# Altium PCB MCU.PcbDoc
Units mil, origin at the board's own origin, x right, y up, seen from the top; angles counter-clockwise.
Board outline 4329.4 x 3387.39 mil, 2 copper layers (Top Layer, Bottom Layer); 111 components, 0 nets, 340 pads, 98 vias.
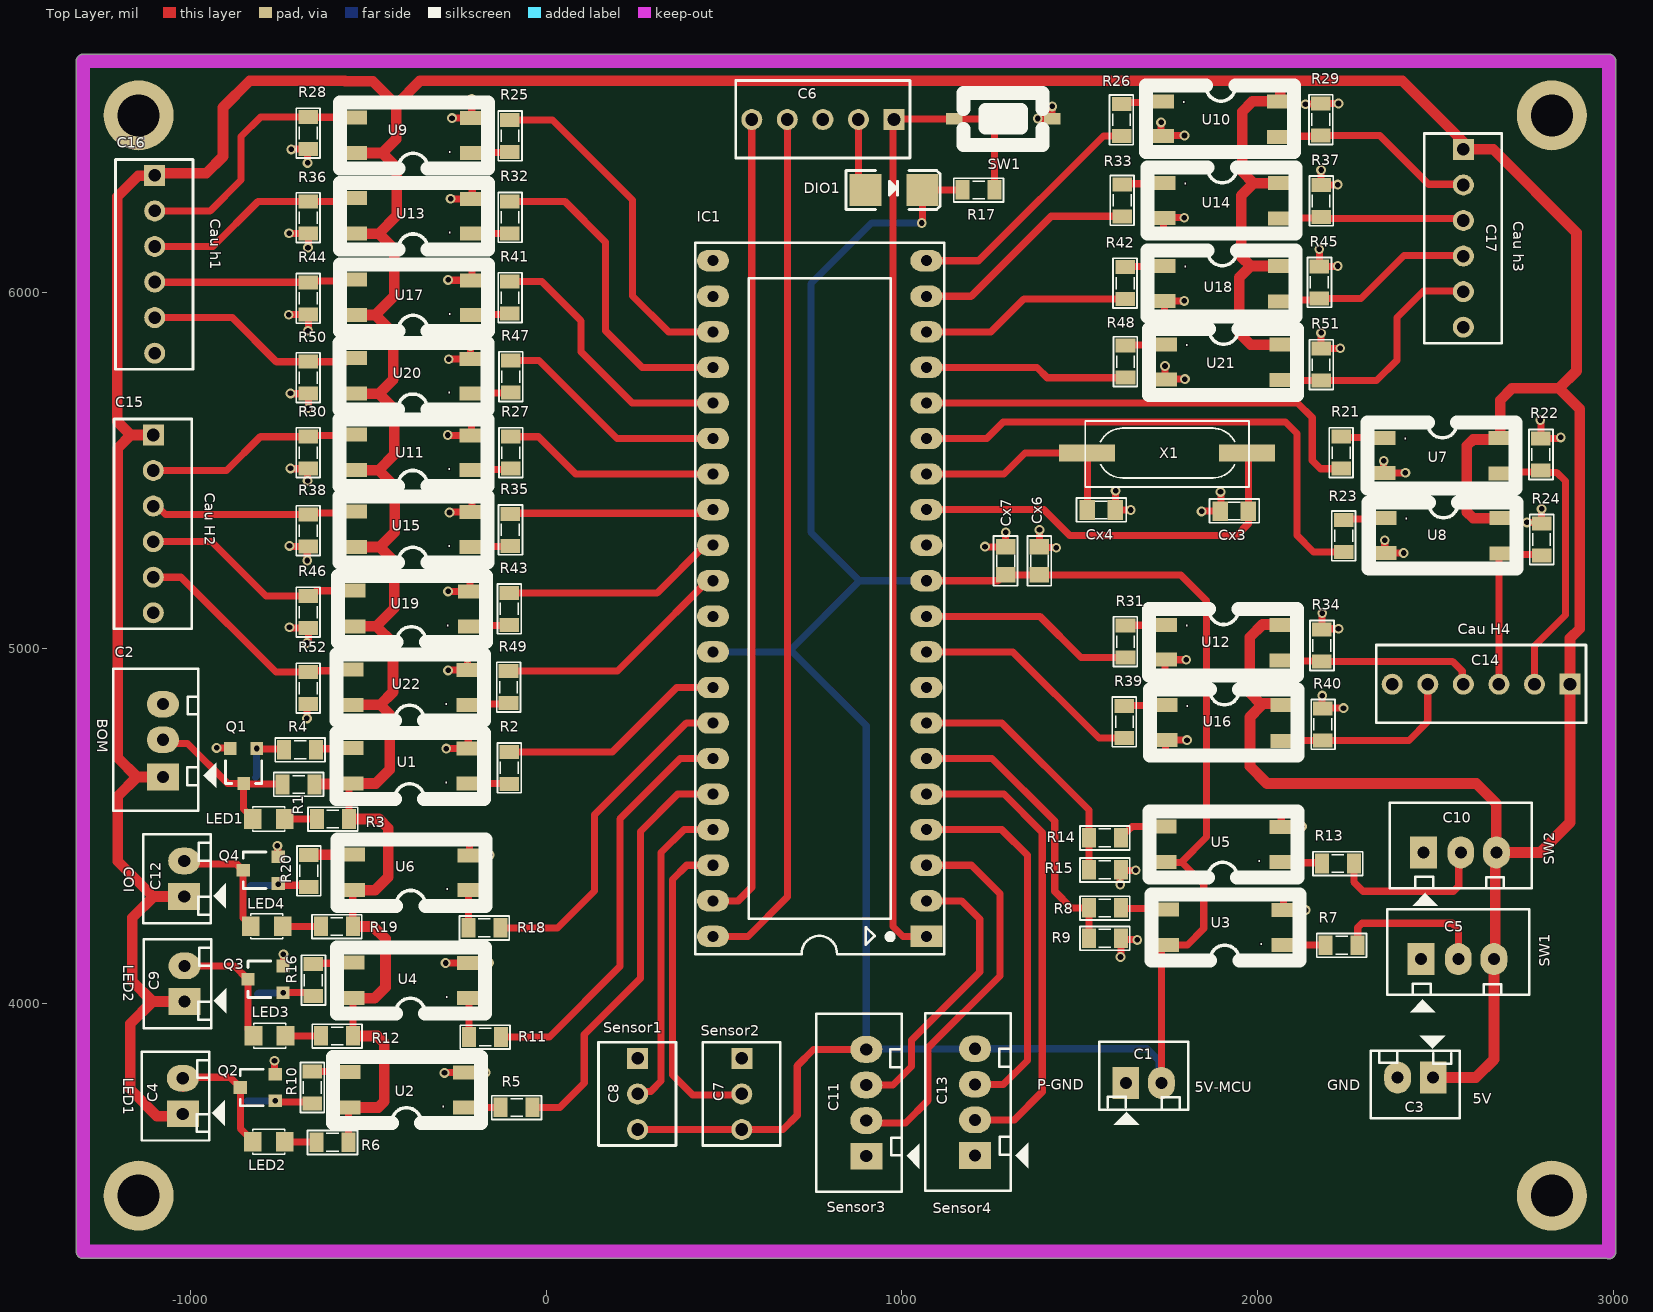
[diagram p0: Top Layer view]
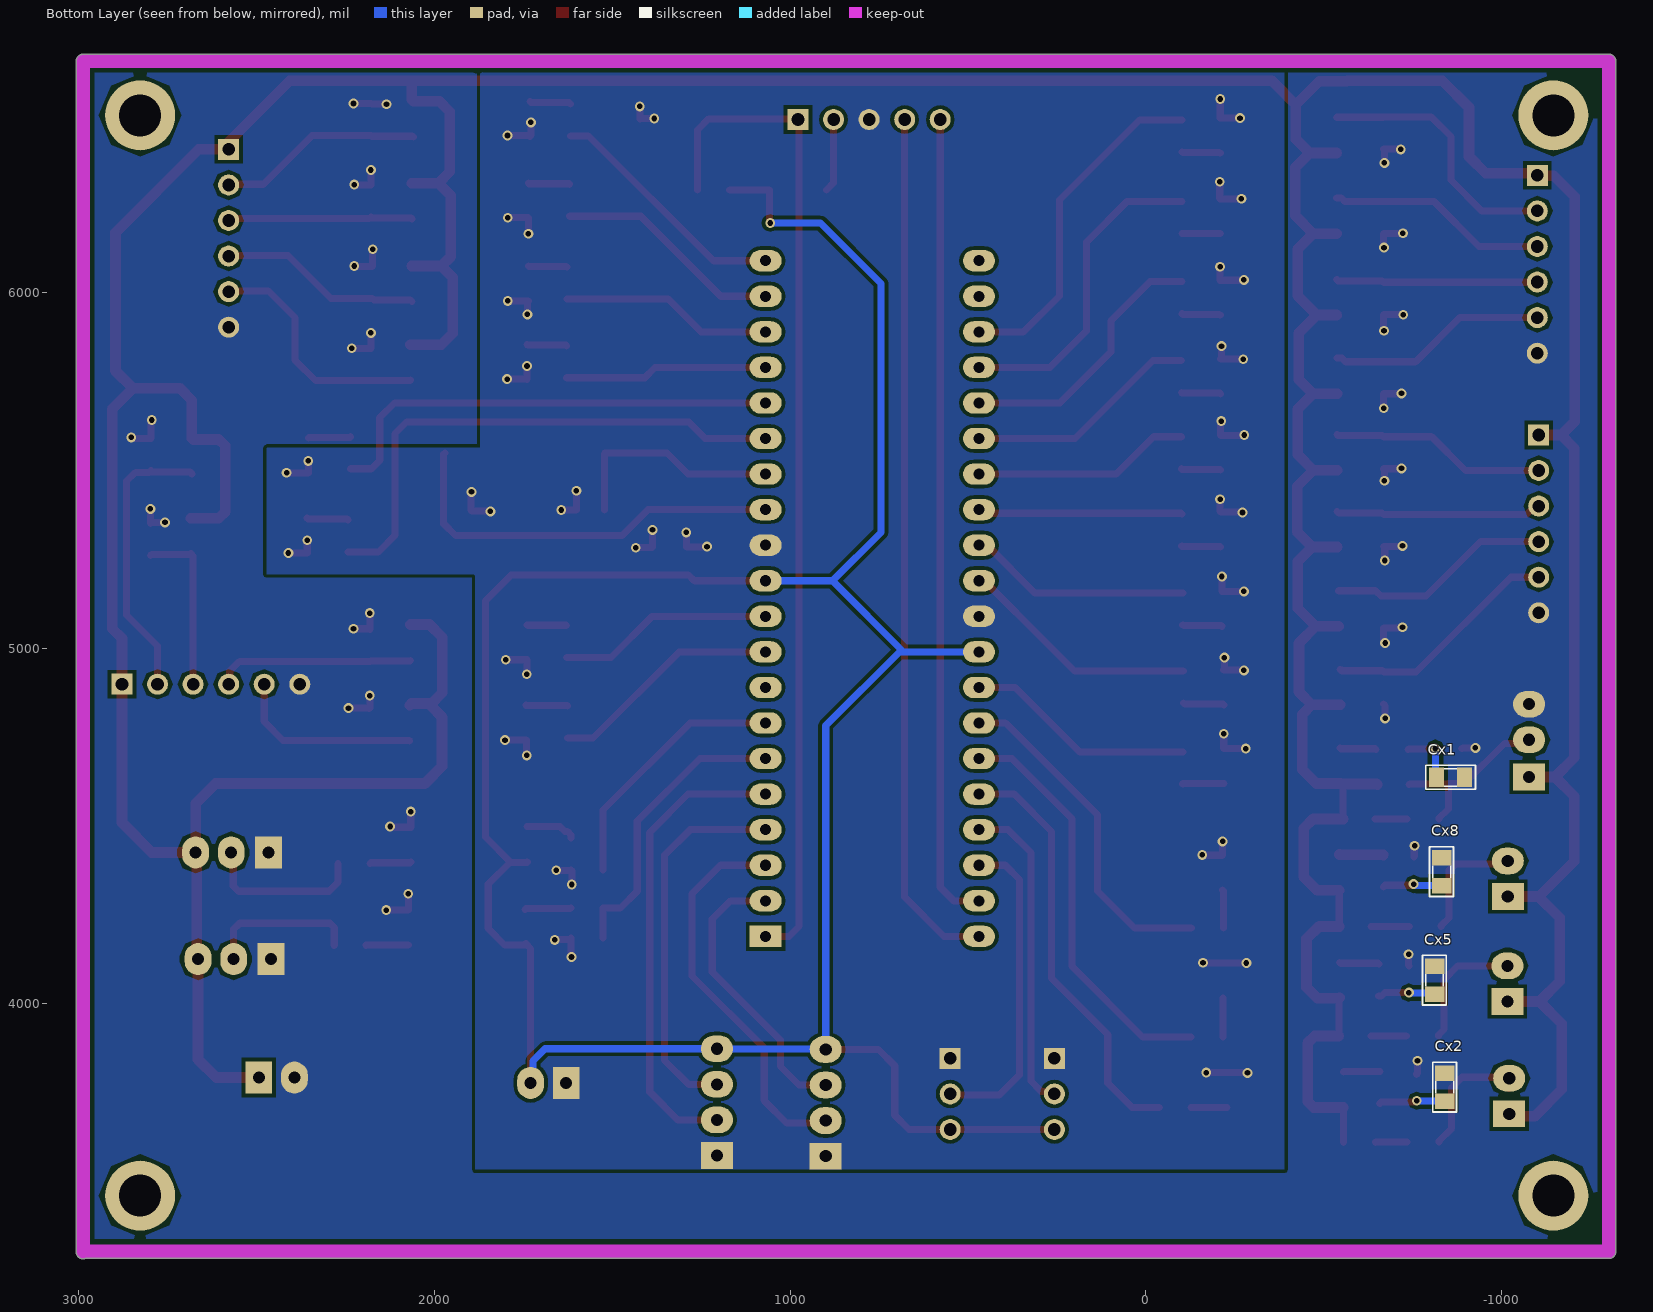
[diagram p1: Bottom Layer view, seen from below]

## Layer stack, top to bottom
Top Solder: solder mask 0.4, Solder Resist, Dk 3.5
Top Layer: signal copper 1.4
Dielectric 1: dielectric 12.6, FR-4, Dk 4.8
Bottom Layer: signal copper 1.4
Bottom Solder: solder mask 0.4, Solder Resist, Dk 3.5

## Board outline
-1321.74,3303.62 -1321.74,6650.62 cw(c-1302.04,6650.62) -1302.04,6670.32 2987.96,6670.32 cw(c2987.96,6650.62) 3007.66,6650.62 3007.66,3508.62 3007.66,3302.62 cw(c2987.96,3302.62) 2981.76,3283.92 -1302.04,3283.92 cw(c-1302.04,3303.62)

## Design rules (kind name [scope] priority, off if disabled: settings)
Clearance [All] p1: gap=10 ignorepadtopadclearanceinfootprint=FALSE except(0: Arc-Hole Track-Hole SMDPad-Hole THPad-Hole Via-Hole Fill-Hole Poly-Hole Region-Hole Text-Hole)
PolygonConnect [All] p1: connectstyle=Relief reliefconductorwidth=10 reliefentries=4 polygonreliefangle="90 Angle" airgapwidth=10
RoutingVias [All] p1: holewidth=28 width=50 viastyle="Through Hole" minholewidth=28 minwidth=50 maxholewidth=28 maxwidth=50
SolderMaskExpansion [All] p1: expansion=4 istentingtop=FALSE
Width [All] p1: maxlimit=10 minlimit=10 preferedwidth=10
30 further rules are at their usual default settings.

## Components (designator, comment, footprint, x,y, rotation, side; value= is the part's Value field where it differs from the comment)
C1 "Header2" Header2 1629.96,3777.62 r0 top
C2 "Header3" Header3 -1078.04,4642.62 r90 top
C3 "Header2" Header2 2493.96,3792.62 r180 top
C4 "Header2" Header2 -1022.04,3690.62 r90 top
C5 "Header3" Header3 2464.96,4125.62 r0 top
C6 "Header5" HDR5 977.96,6486.62 r180 top
C7 "Header3" HDR3 549.96,3846.62 r270 top
C8 "Header3" HDR3 256.96,3846.62 r270 top
C9 "Header2" Header2 -1017.04,4006.62 r90 top
C10 "Header3" Header3 2471.96,4425.62 r0 top
C11 "Header4" Header4 899.96,3571.62 r90 top
C12 "Header2" Header2 -1018.04,4301.62 r90 top
C13 "Header4" Header4 1205.96,3573.62 r90 top
C14 "Header6" HDR6 2878.96,4898.62 r180 top
C15 "Header6" HDR6 -1105.04,5599.62 r270 top
C16 "Header6" HDR6 -1101.04,6329.62 r270 top
C17 "Header6" HDR6 2578.96,6402.62 r270 top
Cx1 "104" CN-SMD-0805 -857.04,4636.62 r0 bottom value=33pF
Cx2 "104" CN-SMD-0805 -841.04,3765.62 r270 bottom value=33pF
Cx3 "33Pf" CN-SMD-0805 1934.96,5385.62 r180 top value=33pF
Cx4 "33Pf" CN-SMD-0805 1560.96,5388.62 r180 top value=33pF
Cx5 "104" CN-SMD-0805 -812.04,4066.62 r270 bottom value=33pF
Cx6 "104" CN-SMD-0805 1386.96,5245.62 r270 top value=33pF
Cx7 "104" CN-SMD-0805 1291.96,5245.62 r270 top value=33pF
Cx8 "104" CN-SMD-0805 -832.04,4371.62 r270 bottom value=33pF
DIO1 "Diode SMD" DIO-SMD-106 977.96,6288.62 r180 top value=1N5007
IC1 "PIC18F4520" DIP40/W0.6 1068.96,4189.62 r90 top value=18F4520
LED1 "LED" LED-0805-Red -735.04,4519.62 r180 top value="LED 3 - 5 ly 2 Colour"
LED2 "LED" LED-0805-Red -735.04,3611.62 r180 top value="LED 3 - 5 ly 2 Colour"
LED3 "LED" LED-0805-Red -733.04,3909.62 r180 top value="LED 3 - 5 ly 2 Colour"
LED4 "LED" LED-0805-Red -741.04,4217.62 r180 top value="LED 3 - 5 ly 2 Colour"
Q1 "2SC1815" SOT23-321 -851.04,4668.62 r180 top value=C1815
Q2 "2SC1815" SOT23-321 -811.04,3764.62 r90 top value=C1815
Q3 "2SC1815" SOT23-321 -789.26,4069.02 r90 top value=C1815
Q4 "2SC1815" SOT23-321 -803.04,4375.62 r90 top value=C1815
R1 "10k" RES-SMD-0805#1 -696.04,4616.62 r180 top
R2 "330" RES-SMD-0805#1 -104.04,4663.62 r90 top
R3 "510" RES-SMD-0805#1 -600.04,4519.62 r0 top
R4 "470" RES-SMD-0805#1 -692.04,4714.62 r0 top
R5 "330" RES-SMD-0805#1 -83.04,3708.62 r0 top
R6 "510" RES-SMD-0805#1 -601.04,3610.62 r0 top
R7 "330" RES-SMD-0805#1 2236.96,4164.62 r0 top
R8 "330" RES-SMD-0805#1 1570.96,4269.62 r0 top
R9 "1k" RES-SMD-0805#1 1570.96,4184.62 r0 top
R10 "470" RES-SMD-0805#2 -658.04,3764.62 r90 top
R11 "330" RES-SMD-0805#1 -172.04,3906.62 r0 top
R12 "510" RES-SMD-0805#1 -588.04,3909.62 r0 top
R13 "330" RES-SMD-0805#1 2225.96,4394.62 r0 top
R14 "330" RES-SMD-0805#1 1570.96,4466.62 r0 top
R15 "1k" RES-SMD-0805#1 1570.96,4376.62 r0 top
R16 "470" RES-SMD-0805#1 -655.04,4066.62 r90 top
R17 "10K" RES-SMD-0805#1 1215.96,6288.62 r0 top
R18 "330" RES-SMD-0805#1 -174.04,4213.62 r0 top
R19 "510" RES-SMD-0805#1 -589.04,4217.62 r0 top
R20 "470" RES-SMD-0805#1 -668.04,4373.62 r90 top
R21 "330" RES-SMD-0805#1 2235.96,5549.62 r270 top
R22 "1k" RES-SMD-0805#1 2796.96,5544.62 r90 top
R23 "330" RES-SMD-0805#1 2242.96,5315.62 r270 top
R24 "1k" RES-SMD-0805#1 2798.96,5305.62 r90 top
R25 "330" RES-SMD-0805#1 -102.04,6440.62 r90 top
R26 "330" RES-SMD-0805#1 1617.96,6485.62 r270 top
R27 "330" RES-SMD-0805#1 -100.04,5549.62 r90 top
R28 "1k" RES-SMD-0805#1 -669.04,6448.62 r270 top
R29 "1k" RES-SMD-0805#1 2177.96,6486.62 r90 top
R30 "1k" RES-SMD-0805#1 -669.04,5549.62 r270 top
R31 "330" RES-SMD-0805#1 1628.96,5018.62 r270 top
R32 "330" RES-SMD-0805#1 -102.04,6211.62 r90 top
R33 "330" RES-SMD-0805#1 1619.96,6259.62 r270 top
R34 "1k" RES-SMD-0805#1 2180.96,5007.62 r90 top
R35 "330" RES-SMD-0805#1 -101.04,5332.62 r90 top
R36 "1k" RES-SMD-0805#1 -669.04,6210.62 r270 top
R37 "1k" RES-SMD-0805#1 2178.96,6257.62 r90 top
R38 "1k" RES-SMD-0805#1 -669.04,5330.62 r270 top
R39 "330" RES-SMD-0805#1 1625.96,4792.62 r270 top
R40 "1k" RES-SMD-0805#1 2183.96,4785.62 r90 top
R41 "330" RES-SMD-0805#1 -102.04,5985.62 r90 top
R42 "330" RES-SMD-0805#1 1627.96,6026.62 r270 top
R43 "330" RES-SMD-0805#1 -104.04,5110.62 r90 top
R44 "1k" RES-SMD-0805#1 -669.04,5983.62 r270 top
R45 "1k" RES-SMD-0805#1 2173.96,6028.62 r90 top
R46 "1k" RES-SMD-0805#1 -669.04,5101.62 r270 top
R47 "330" RES-SMD-0805#1 -100.04,5763.62 r90 top
R48 "330" RES-SMD-0805#1 1628.96,5805.62 r270 top
R49 "330" RES-SMD-0805#1 -106.04,4890.62 r90 top
R50 "1k" RES-SMD-0805#1 -669.04,5760.62 r270 top
R51 "1k" RES-SMD-0805#1 2178.96,5797.62 r90 top
R52 "1k" RES-SMD-0805#1 -669.04,4887.62 r270 top
SW1 "SW" SW1-SMD 1284.96,6488.62 r180 top value="SW chip 2 pin"
U1 "PC817" SO4#1 -219.34,4719.62 r180 top
U2 "PC817" SO4#2 -228.04,3808.62 r180 top
U3 "PC817" SO4#1 2072.96,4265.62 r180 top
U4 "PC817" SO4#1 -217.04,4116.62 r180 top
U5 "PC817" SO4#1 2066.96,4498.62 r180 top
U6 "PC817" SO4#1 -216.04,4419.62 r180 top
U7 "PC817" SO4#1 2354.96,5490.62 r0 top
U8 "PC817" SO4#1 2357.96,5265.62 r0 top
U9 "PC817" SO4#1 -209.34,6492.62 r180 top
U10 "PC817" SO4#1 1731.96,6437.62 r0 top
U11 "PC817" SO4#1 -210.34,5600.62 r180 top
U12 "PC817" SO4#1 1739.96,4965.62 r0 top
U13 "PC817" SO4#1 -209.34,6265.62 r180 top
U14 "PC817" SO4#1 1735.96,6207.62 r0 top
U15 "PC817" SO4#1 -210.34,5384.62 r180 top
U16 "PC817" SO4#1 1742.25,4739.62 r0 top
U17 "PC817" SO4#1 -209.34,6036.62 r180 top
U18 "PC817" SO4#1 1735.96,5974.62 r0 top
U19 "PC817" SO4#1 -214.34,5161.62 r180 top
U20 "PC817" SO4#1 -210.34,5815.62 r180 top
U21 "PC817" SO4#1 1739.96,5753.62 r0 top
U22 "PC817" SO4#1 -219.34,4940.62 r180 top
X1 "12Mhz" XTAL-RU49/4 1940.96,5548.62 r180 top value=4Mhz

## Footprints (in the part's own frame and the unit in brackets; to place one, negate y for a bottom-side part, rotate by r counter-clockwise, add the part's x,y. Pads: shape width x height; smd on the part's side, far side on the other; paste and mask are expansions set on the pad)
CN-SMD-0805 [mil]
  rect 43.31x55 smd: 1(-39.36,0.01) 2(39.37,0.01)
  silkscreen extent -70,-34 70,33, body extent -39,-25 39,25, height 31
DIO-SMD-106 [mil]
  rect 90x90.55 smd: 1(80,0) 2(-80,0)
  silkscreen extent -130,-55 135,55, body extent -99,-50 106,52, height 95
DIP40/W0.6 [mil] "40 PIN, W 600mil, Pin to pin 100mil"
  rect 60x90 hole 31 paste+0 mask+4: 1(0,0)
  oval 60x90 hole 31 paste+0 mask+4: 2(100,0) 3(200,0) 4(300,0) 5(400,0) 6(500,0) 7(600,0) 8(700,0) 9(800,0) 10(900,0) 11(1000,0) 12(1100,0) 13(1200,0) 14(1300,0) 15(1400,0) 16(1500,0) 17(1600,0) 18(1700,0) 19(1800,0) 20(1900,0) 21(1900,600) 22(1800,600) 23(1700,600) 24(1600,600) 25(1500,600) 26(1400,600) 27(1300,600) 28(1200,600) 29(1100,600) 30(1000,600) 31(900,600) 32(800,600) 33(700,600) 34(600,600) 35(500,600) 36(400,600) 37(300,600) 38(200,600) 39(100,600) 40(0,600)
  silkscreen extent -50,-50 1950,650, body extent -82,-10 1982,600, height 224
HDR3 [mm] "Connector; Header; 3 Position"
  rect 1.5x1.5 hole 0.9 paste+0 mask+0.102: 1(0,0)
  round 1.5 hole 0.9 paste+0 mask+0.102: 2(2.54,0) 3(5.08,0)
  silkscreen extent -1.14,-2.79 6.22,2.74, body extent -1.27,-2.92 6.35,2.88, height 11.72
HDR5 [mm] "Connector; Header; 5 Position"
  rect 1.5x1.5 hole 0.9 paste+0 mask+0.102: 1(0,0)
  round 1.5 hole 0.9 paste+0 mask+0.102: 2(2.54,0) 3(5.08,0) 4(7.62,0) 5(10.16,0)
  silkscreen extent -1.14,-2.79 11.3,2.74, body extent -1.27,-2.92 11.43,2.88, height 11.72
HDR6 [mm] "Connector; Header; 6 Position"
  rect 1.5x1.5 hole 0.9 paste+0 mask+0.102: 1(0,0)
  round 1.5 hole 0.9 paste+0 mask+0.102: 2(2.54,0) 3(5.08,0) 4(7.62,0) 5(10.16,0) 6(12.7,0)
  silkscreen extent -1.14,-2.79 13.84,2.74, body extent -1.27,-2.92 13.97,2.88, height 11.72
Header2 [mil] "CON2"
  rect 75x90 hole 34 paste+0 mask+4: 1(0,0)
  oval 75x90 hole 34 paste+0 mask+4: 2(100,0)
  silkscreen extent -75,-118 175,115, body extent -68,-70 168,107, height 236
Header3 [mil] "CON 3"
  rect 75x90 hole 34 paste+0 mask+4: 1(-5,0)
  oval 75x90 hole 34 paste+0 mask+4: 2(100,0) 3(200,0)
  silkscreen extent -100,-150 300,140, body extent -95,-90 295,136, height 276
Header4 [mil] "CON4"
  rect 75x90 hole 34 paste+0 mask+4: 1(0,0)
  oval 75x90 hole 34 paste+0 mask+4: 2(100,0) 3(200,0) 4(300,0)
  silkscreen extent -100,-150 400,140, body extent -90,-90 398,136, height 276
LED-0805-Red [mil]
  rect 50x55 smd: 1(0,0) 2(90,0)
  silkscreen extent 0,-35 90,35, body extent 5,-25 85,25, height 43
RES-SMD-0805#1 [mil]
  rect 39.37x55 smd: 1(-45,0) 2(45,0)
  silkscreen extent -70,-34 70,33, body extent -39,-25 39,25, height 31
RES-SMD-0805#2 [mil]
  rect 39.37x55 smd paste+0 mask+4: 1(-45,0) 2(45,0)
  silkscreen extent -70,-34 70,33, body extent -39,-25 39,25, height 31
SO4#1 [mm]
  rect 1.7x1 smd: 1(0,2.54) 2(0,0.051) 3(8.324,0) 4(8.324,2.54)
  silkscreen extent -1.14,-1.07 9.42,3.66, body extent -0.17,-0.99 8.4,3.59, height 3.72
SO4#2 [mm]
  rect 1.7x1 smd paste+0 mask+0.102: 1(0,2.54) 2(0,0.051) 3(8.324,0) 4(8.324,2.54)
  silkscreen extent -1.14,-1.07 9.42,3.66, body extent -0.17,-0.99 8.4,3.59, height 3.72
SOT23-321 [mm]
  rect 0.9x0.95 smd: 1(0.95,-1.25) 2(0,1.25) 3(-0.95,-1.25)
  silkscreen extent -1.3,-0.38 1.3,1.25, body extent -1.52,-1.23 1.48,1.27, height 1.06
SW1-SMD [mm]
  rect 1.2x0.8 smd: 1(-3.5,0) 2(3.5,0)
  silkscreen extent -2.82,-1.85 2.82,1.85, body extent -3.05,-1.85 3.05,1.85, height 2.5
XTAL-RU49/4 [mm]
  rect 4x1.2 smd: 1(-0.762,0) 2(10.668,0)
  silkscreen extent -0.89,-2.29 10.8,2.41, body extent -1.2,-2.22 11.1,2.48, height 4.3

## Part data
C1 C3 C4 C9 C12: "Header IDC, 2 x 1 Pin Vertical 2.54mm Pitch (Non-Boxed, Male)", Manufacturer="W¨¹rth Elektronik eiSos GmbH", partNo=613002143121, ComponentLink1 Description=Manufacturer, ComponentLink1URL=http://www.we-online.com, ComponentLink2 Description=Datasheet, ComponentLink2URL=http://katalog.we-online.de/em/datasheet/6130xx143121.pdf, Created by="Karrer Zheng", Created Date="29 March 2013", NoPins=02
C2 C5 C7 C8 C10: "Header IDC, 3 x 1 Pin Vertical 2.54mm Pitch (Non-Boxed, Male)", Manufacturer="W¨¹rth Elektronik eiSos GmbH", partNo=613002143121, ComponentLink1 Description=Manufacturer, ComponentLink1URL=http://www.we-online.com, ComponentLink2 Description=Datasheet, ComponentLink2URL=http://katalog.we-online.de/em/datasheet/6130xx143121.pdf, Created by="Karrer Zheng", Created Date="29 March 2013", NoPins=02
C6: "Header IDC, 5 x 1 Pin Vertical 2.54mm Pitch (Non-Boxed, Male)", Manufacturer="W¨¹rth Elektronik eiSos GmbH", partNo=613002143121, ComponentLink1 Description=Manufacturer, ComponentLink1URL=http://www.we-online.com, ComponentLink2 Description=Datasheet, ComponentLink2URL=http://katalog.we-online.de/em/datasheet/6130xx143121.pdf, Created by="Karrer Zheng", Created Date="29 March 2013", NoPins=02
C11 C13: "Header IDC, 4 x 1 Pin Vertical 2.54mm Pitch (Non-Boxed, Male)", Manufacturer="W¨¹rth Elektronik eiSos GmbH", partNo=613002143121, ComponentLink1 Description=Manufacturer, ComponentLink1URL=http://www.we-online.com, ComponentLink2 Description=Datasheet, ComponentLink2URL=http://katalog.we-online.de/em/datasheet/6130xx143121.pdf, Created by="Karrer Zheng", Created Date="29 March 2013", NoPins=02
C14 C15 C16 C17: "Header IDC, 6 x 1 Pin Vertical 2.54mm Pitch (Non-Boxed, Male)", Manufacturer="W¨¹rth Elektronik eiSos GmbH", partNo=613002143121, ComponentLink1 Description=Manufacturer, ComponentLink1URL=http://www.we-online.com, ComponentLink2 Description=Datasheet, ComponentLink2URL=http://katalog.we-online.de/em/datasheet/6130xx143121.pdf, Created by="Karrer Zheng", Created Date="29 March 2013", NoPins=02
Cx1 Cx2 Cx3 Cx4 Cx5 Cx6 Cx7 Cx8: library part CN
DIO1: "Default Diode", Code - JEDEC=DO-214-AB, Published=8-Jun-2000, Publisher="Altium Limited", Revision="July-2002: Re-released for DXP Platform."
IC1: "32KB Flash, 1536B RAM, 256B EFROM, 40-Pin PDIP", Copyright by=VanDungEvn
LED1 LED2 LED3 LED4: library part "LED SMD"
Q1 Q2 Q3 Q4: "NPN 600mW, ECB"
R1 R2 R3 R4 R5 R6 R7 R8 R9 R10 R11 R12 R13 R14 R15 R16 R17 R18 R19 R20 R21 R22 R23 R24 R25 R26 R27 R28 R29 R30 R31 R32 R33 R34 R35 R36 R37 R38 R39 R40 R41 R42 R43 R44 R45 R46 R47 R48 R49 R50 R51 R52: library part Res-SMD, "Resistor", Manufacturer="Generic Components", Class=Passive, Published=08/06/2000, Publisher="Altium Hobart Technology Centre"
SW1: library part SW2, "Switch button 2 pin"
U1 U2 U3 U4 U5 U6 U7 U8 U9 U10 U11 U12 U13 U14 U15 U16 U17 U18 U19 U20 U21 U22: "Single Opto"
X1: library part XT2, "Crystal, 32.768 KHz, -40 to 85 degC, 3.2 x 1.5 x 0.9 mm SMD"

## Free pads (board coordinates)
  round 196.85 hole 118.11 paste+0 mask+0: 2(-1146.04,3460.62) 2(-1146.04,6498.62) 2(2827.96,3460.62) 2(2827.96,6498.62)

## Via types
v1: diameter 27.56, hole 15.75, Top Layer to Bottom Layer, tented both sides, 98 vias

## Nets (pads, with @x,y where several pads share a name; then routed paths per layer and width w, separated by ;. In a path a pad name is that pad's centre, name@x,y a point inside that pad or via, vN(x,y) a via of type N, cw(c..) or ccw(c..) an arc to the next point about the centre after c; other vN are vias at no path point)
pads on no net: C1.1 C1.2 C2.1 C2.2 C2.3 C3.1 C3.2 C4.1 C4.2 C5.1 C5.2 C5.3 C6.1 C6.2 C6.3 C6.4 C6.5 C7.1 C7.2 C7.3 C8.1 C8.2 C8.3 C9.1 C9.2 C10.1 C10.2 C10.3 C11.1 C11.2 C11.3 C11.4 C12.1 C12.2 C13.1 C13.2 C13.3 C13.4 C14.1 C14.2 C14.3 C14.4 C14.5 C14.6 C15.1 C15.2 C15.3 C15.4 C15.5 C15.6 C16.1 C16.2 C16.3 C16.4 C16.5 C16.6 C17.1 C17.2 C17.3 C17.4 C17.5 C17.6 Cx1.1 Cx1.2 Cx2.1 Cx2.2 Cx3.1 Cx3.2 Cx4.1 Cx4.2 Cx5.1 Cx5.2 Cx6.1 Cx6.2 Cx7.1 Cx7.2 Cx8.1 Cx8.2 DIO1.1 DIO1.2 IC1.1 IC1.2 IC1.3 IC1.4 IC1.5 IC1.6 IC1.7 IC1.8 IC1.9 IC1.10 IC1.11 IC1.12 IC1.13 IC1.14 IC1.15 IC1.16 IC1.17 IC1.18 IC1.19 IC1.20 IC1.21 IC1.22 IC1.23 IC1.24 IC1.25 IC1.26 IC1.27 IC1.28 IC1.29 IC1.30 IC1.31 IC1.32 IC1.33 IC1.34 IC1.35 IC1.36 IC1.37 IC1.38 IC1.39 IC1.40 LED1.1 LED1.2 LED2.1 LED2.2 LED3.1 LED3.2 LED4.1 LED4.2 Q1.1 Q1.2 Q1.3 Q2.1 Q2.2 Q2.3 Q3.1 Q3.2 Q3.3 Q4.1 Q4.2 Q4.3 R1.1 R1.2 R2.1 R2.2 R3.1 R3.2 R4.1 R4.2 R5.1 R5.2 R6.1 R6.2 R7.1 R7.2 R8.1 R8.2 R9.1 R9.2 R10.1 R10.2 R11.1 R11.2 R12.1 R12.2 R13.1 R13.2 R14.1 R14.2 R15.1 R15.2 R16.1 R16.2 R17.1 R17.2 R18.1 R18.2 R19.1 R19.2 R20.1 R20.2 R21.1 R21.2 R22.1 R22.2 R23.1 R23.2 R24.1 R24.2 R25.1 R25.2 R26.1 R26.2 R27.1 R27.2 R28.1 R28.2 R29.1 R29.2 R30.1 R30.2 R31.1 R31.2 R32.1 R32.2 R33.1 R33.2 R34.1 R34.2 R35.1 R35.2 R36.1 R36.2 R37.1 R37.2 R38.1 R38.2 R39.1 R39.2 R40.1 R40.2 R41.1 R41.2 R42.1 R42.2 R43.1 R43.2 R44.1 R44.2 R45.1 R45.2 R46.1 R46.2 R47.1 R47.2 R48.1 R48.2 R49.1 R49.2 R50.1 R50.2 R51.1 R51.2 R52.1 R52.2 SW1.1 SW1.2 U1.1 U1.2 U1.3 U1.4 U2.1 U2.2 U2.3 U2.4 U3.1 U3.2 U3.3 U3.4 U4.1 U4.2 U4.3 U4.4 U5.1 U5.2 U5.3 U5.4 U6.1 U6.2 U6.3 U6.4 U7.1 U7.2 U7.3 U7.4 U8.1 U8.2 U8.3 U8.4 U9.1 U9.2 U9.3 U9.4 U10.1 U10.2 U10.3 U10.4 U11.1 U11.2 U11.3 U11.4 U12.1 U12.2 U12.3 U12.4 U13.1 U13.2 U13.3 U13.4 U14.1 U14.2 U14.3 U14.4 U15.1 U15.2 U15.3 U15.4 U16.1 U16.2 U16.3 U16.4 U17.1 U17.2 U17.3 U17.4 U18.1 U18.2 U18.3 U18.4 U19.1 U19.2 U19.3 U19.4 U20.1 U20.2 U20.3 U20.4 U21.1 U21.2 U21.3 U21.4 U22.1 U22.2 U22.3 U22.4 X1.1 X1.2
copper on no net: | length 80244
  Top Layer w20: -1105.04,5199.62 -1027.04,5199.62 -760.05,4932.62 -669.04,4932.62 -665.05,4936.62 -551.04,4936.62 -547.04,4940.62 ; -1105.04,5299.62 -941.04,5299.62 -788.05,5146.62 -669.04,5146.62 -661.23,5146.62 -646.23,5161.62 -542.04,5161.62 ; -1105.04,5399.62 -1094.48,5399.62 -1070.48,5375.62 -669.04,5375.62 -664.55,5380.12 -542.54,5380.12 -538.04,5384.62 ; -1105.04,5499.62 -899.04,5499.62 -804.04,5594.62 -669.04,5594.62 -666.05,5597.62 -541.04,5597.62 -538.04,5600.62 ; -1101.04,5929.62 -883.04,5929.62 -759.05,5805.62 -669.04,5805.62 -561.82,5805.62 -551.82,5815.62 -538.04,5815.62 ; -1101.04,6029.62 -1100.55,6029.12 -669.54,6029.12 -669.04,6028.62 -665.05,6032.62 -541.04,6032.62 -537.04,6036.62 ; -1101.04,6129.62 -937.04,6129.62 -811.04,6255.62 -669.04,6255.62 -560.82,6255.62 -550.82,6265.62 -537.04,6265.62 ; -1101.04,6229.62 -945.04,6229.62 -858.04,6316.62 -858.04,6438.62 -803.04,6493.62 -669.04,6493.62 -668.54,6493.12 -537.55,6493.12 -537.04,6492.62 ; -1078.04,4742.62 -1067.52,4732.1 -1008.52,4732.1 -895.83,4619.41 -851.04,4619.41 ; -1022.04,3762.62 -1021.04,3763.62 ; -1022.04,3790.62 -1019.04,3793.62 -889.26,3793.62 -868.96,3773.32 -868.96,3772.34 -861.24,3764.62 -860.26,3764.62 -860.26,3649.33 -825.04,3614.12 -825.04,3611.62 ; -1018.04,4401.62 -1009.04,4392.62 -870.24,4392.62 -853.24,4375.62 -852.26,4375.62 -852.26,4241.33 -831.04,4220.12 -831.04,4217.62 ; -1017.04,4106.62 -877.05,4106.62 -839.45,4069.02 -838.47,4069.02 -838.47,3927.55 -823.04,3912.12 -823.04,3909.62 ; v1(-927.04,4719.62) -890.23,4719.62 -888.45,4717.83 ; -825.04,4519.62 -825.04,4522.12 -851.04,4548.12 -851.04,4619.41 ; v1(-813.64,4717.83) -812.04,4716.23 -738.65,4716.23 -737.05,4714.62 ; v1(-764.04,3839.62) -764.04,3804.24 -761.83,3802.02 ; v1(-761.83,3727.22) -758.03,3723.42 -661.84,3723.42 -658.04,3719.62 ; v1(-756.04,4444.62) -754.94,4443.52 -754.94,4414.13 -753.83,4413.02 ; v1(-753.04,4336.62) -753.83,4337.41 -753.83,4338.22 -749.03,4333.42 -672.84,4333.42 -668.04,4328.62 ; -741.04,4217.62 -634.05,4217.62 ; -741.04,4616.62 -742.44,4618.02 -849.65,4618.02 -851.04,4619.41 ; v1(-740.04,4031.62) -672.86,4031.62 -662.86,4021.62 -655.04,4021.62 ; -740.04,4106.42 -739.04,4107.42 v1(-739.04,4139.62) ; -735.04,3611.62 -734.54,3611.12 -646.55,3611.12 -646.05,3610.62 ; -735.04,4519.62 -645.05,4519.62 ; -733.04,3909.62 -633.04,3909.62 ; v1(-724.04,5937.62) -723.04,5938.62 -669.04,5938.62 -669.04,5893.62 v1(-670.04,5892.62) ; v1(-723.04,6166.62) -722.05,6165.62 -669.04,6165.62 -669.04,6127.62 v1(-670.04,6126.62) ; v1(-722.04,5058.62) -720.05,5056.62 -669.04,5056.62 -669.04,5018.62 v1(-673.04,5014.62) ; v1(-722.04,5287.62) -720.05,5285.62 -669.04,5285.62 -672.04,5282.62 v1(-672.04,5246.62) ; v1(-719.04,5505.62) -718.05,5504.62 -669.04,5504.62 -671.04,5502.62 v1(-671.04,5470.62) ; v1(-719.04,5716.62) -718.05,5715.62 -669.04,5715.62 v1(-669.04,5674.62) ; v1(-717.04,6402.62) -716.04,6403.62 -669.04,6403.62 -671.04,6401.62 v1(-671.04,6364.62) ; v1(-673.04,4802.62) -673.04,4838.62 -669.04,4842.62 ; -658.04,3809.62 -657.55,3809.12 -556.24,3809.12 -555.75,3808.62 ; -655.04,4111.62 -652.54,4114.12 -547.25,4114.12 -544.75,4116.62 ; -647.05,4714.62 -644.55,4717.12 -549.54,4717.12 -547.04,4719.62 ; -556.05,3610.62 -556.05,3708.32 -555.75,3708.62 ; -555.05,4519.62 -555.05,4611.62 -548.54,4618.12 ; -544.05,4217.62 -544.05,4319.32 ; -543.75,4015.62 -543.04,4014.92 -543.04,3909.62 ; v1(-286.04,3805.62) -285.04,3806.62 -228.04,3806.62 v1(-170.04,3806.62) ; v1(-283.04,4114.62) -217.04,4114.62 -162.04,4114.62 v1(-161.04,4115.62) ; v1(-281.04,4717.62) -219.34,4717.62 -219.34,4759.32 v1(-219.04,4759.62) ; v1(-277.04,5599.62) -276.04,5598.62 -210.34,5598.62 -210.34,5636.92 v1(-212.04,5638.62) ; v1(-276.04,4937.62) -275.04,4938.62 -219.34,4938.62 -221.04,4940.32 v1(-221.04,4973.62) ; v1(-276.04,5159.62) -214.34,5159.62 -214.34,5201.32 v1(-214.04,5201.62) ; v1(-276.04,6035.62) -275.04,6034.62 -209.34,6034.62 -209.04,6034.92 v1(-209.04,6072.62) ; v1(-274.04,5812.62) -273.04,5813.62 -210.34,5813.62 -213.04,5816.32 v1(-213.04,5849.62) ; v1(-272.04,5381.62) -271.04,5382.62 -210.34,5382.62 -209.04,5383.92 v1(-209.04,5418.62) ; v1(-269.04,6263.62) -209.34,6263.62 -208.04,6264.92 v1(-208.04,6311.62) ; v1(-265.04,6490.62) -209.34,6490.62 v1(-209.34,6544.32) ; -228.04,3708.62 -128.05,3708.62 ; -219.34,4619.62 -218.84,4619.12 -104.55,4619.12 -104.04,4618.62 ; -219.34,4840.62 -216.84,4843.12 -108.54,4843.12 -106.04,4845.62 ; -219.05,4213.62 -219.05,4316.62 -216.04,4319.62 ; -217.04,3906.62 -217.04,4016.62 ; v1(-216.04,4456.62) -216.04,4417.62 -160.04,4417.62 v1(-159.04,4418.62) ; -214.34,5061.62 -212.34,5063.62 -106.04,5063.62 -104.04,5065.62 ; -210.34,5284.62 -208.84,5286.12 -102.54,5286.12 -101.04,5287.62 ; -210.34,5500.62 -208.34,5502.62 -102.04,5502.62 -100.04,5504.62 ; -210.34,5715.62 -208.84,5717.12 -101.54,5717.12 -100.04,5718.62 ; -209.34,5936.62 -207.34,5938.62 -104.04,5938.62 -102.04,5940.62 ; -209.34,6165.62 -208.84,6166.12 -102.54,6166.12 -102.04,6166.62 ; -209.34,6392.62 -207.84,6394.12 -103.54,6394.12 -102.04,6395.62 ; -129.05,4213.62 31.96,4213.62 135.96,4317.62 135.96,4531.62 393.96,4789.62 468.96,4789.62 ; -127.04,3906.62 8.96,3906.62 206.96,4104.62 206.96,4519.62 376.96,4689.62 468.96,4689.62 ; -106.04,4935.62 199.95,4935.62 270.96,5006.62 453.96,5189.62 468.96,5189.62 ; -104.04,4708.62 185.95,4708.62 366.96,4889.62 468.96,4889.62 ; -104.04,5155.62 311.95,5155.62 445.96,5289.62 468.96,5289.62 ; -102.04,6030.62 -12.04,6030.62 97.96,5920.62 97.96,5833.62 241.96,5689.62 468.96,5689.62 ; -102.04,6256.62 51.96,6256.62 166.96,6141.62 166.96,5892.62 269.96,5789.62 468.96,5789.62 ; -102.04,6485.62 17.96,6485.62 242.96,6260.62 242.96,5990.62 343.96,5889.62 468.96,5889.62 ; -101.04,5377.62 -99.04,5379.62 433.13,5379.62 443.13,5389.62 468.96,5389.62 ; -100.04,5594.62 -22.04,5594.62 82.96,5489.62 468.96,5489.62 ; -100.04,5808.62 -20.04,5808.62 198.96,5589.62 468.96,5589.62 ; -38.05,3708.62 37.96,3708.62 106.96,3777.62 106.96,3913.62 264.96,4071.62 264.96,4484.62 369.96,4589.62 468.96,4589.62 ; 256.96,3646.62 549.96,3646.62 665.96,3646.62 705.96,3686.62 705.96,3825.62 751.96,3871.62 899.96,3871.62 ; 256.96,3746.62 264.05,3753.71 294.05,3753.71 322.96,3782.62 322.96,4425.62 386.96,4489.62 468.96,4489.62 ; 468.96,4189.62 566.96,4189.62 677.96,4300.62 677.96,6486.62 ; 468.96,4289.62 539.96,4289.62 577.96,4327.62 577.96,6486.62 ; 468.96,4389.62 394.96,4389.62 354.96,4349.62 354.96,3800.62 411.96,3743.62 546.96,3743.62 549.96,3746.62 ; 877.96,6486.62 877.96,6308.62 897.96,6288.62 ; 899.96,3671.62 906.96,3664.62 1009.96,3664.62 1072.96,3727.62 1072.96,3875.62 1275.96,4078.62 1275.96,4309.62 1195.96,4389.62 1068.96,4389.62 ; 899.96,3771.62 974.96,3771.62 1026.96,3823.62 1026.96,3897.62 1218.96,4089.62 1218.96,4238.62 1167.96,4289.62 1068.96,4289.62 ; v1(1055.96,6195.62) 1057.96,6197.62 1057.96,6288.62 1170.95,6288.62 ; 1068.96,4189.62 1002.96,4189.62 974.96,4217.62 974.96,6483.62 977.96,6486.62 978.96,6487.62 1146.16,6487.62 1147.16,6488.62 1229.96,6488.62 1260.95,6457.62 1260.95,6288.62 ; 1068.96,4489.62 1280.96,4489.62 1352.96,4417.62 1352.96,3840.62 1285.96,3773.62 1205.96,3773.62 ; 1068.96,4589.62 1286.96,4589.62 1394.96,4481.62 1394.96,3752.62 1315.96,3673.62 1205.96,3673.62 ; 1068.96,4689.62 1253.96,4689.62 1429.96,4513.62 1429.96,4316.62 1476.96,4269.62 1525.95,4269.62 1525.95,4184.62 ; 1068.96,4789.62 1280.96,4789.62 1525.95,4544.62 1525.95,4466.62 1525.95,4376.62 ; 1068.96,4989.62 1311.96,4989.62 1553.95,4747.62 1625.96,4747.62 ; 1068.96,5089.62 1387.96,5089.62 1503.96,4973.62 1628.96,4973.62 ; 1068.96,5189.62 1269.49,5189.62 1286.12,5206.25 1291.96,5206.25 1386.96,5206.25 1784.33,5206.25 1856.96,5133.62 1856.96,4468.62 1787.96,4399.62 1787.96,4397.62 ; 1068.96,5389.62 1398.96,5389.62 1471.96,5316.62 1940.96,5316.62 1974.32,5349.99 1974.32,5385.61 1974.32,5545.26 1970.96,5548.62 ; 1068.96,5489.62 1286.96,5489.62 1345.96,5548.62 1520.96,5548.62 1521.58,5548 1521.58,5388.61 ; 1068.96,5589.62 1238.96,5589.62 1284.96,5635.62 2078.96,5635.62 2110.96,5603.62 2110.96,5317.62 2157.95,5270.62 2242.96,5270.62 ; 1068.96,5689.62 2112.96,5689.62 2153.96,5648.62 2153.96,5527.62 2176.95,5504.62 2235.96,5504.62 ; 1068.96,5789.62 1379.96,5789.62 1408.96,5760.62 1628.96,5760.62 ; 1068.96,5889.62 1250.96,5889.62 1342.96,5981.62 1627.96,5981.62 ; 1068.96,5989.62 1194.96,5989.62 1419.96,6214.62 1619.96,6214.62 ; 1068.96,6089.62 1215.96,6089.62 1566.96,6440.62 1617.96,6440.62 ; v1(1233.96,5285.62) 1234.59,5284.99 1291.96,5284.99 v1(1291.96,5325.62) ; v1(1381.96,6489.62) 1421.75,6489.62 1422.75,6488.62 1422.75,6523.42 v1(1422.96,6523.62) ; v1(1386.96,5332.62) 1386.96,5284.99 1389.33,5282.62 v1(1433.96,5282.62) ; v1(1600.96,5442.62) 1600.96,5389.25 1600.32,5388.61 v1@1643.95,5388.61 ; v1(1613.96,4335.62) 1612.96,4336.62 1612.96,4373.62 1615.95,4376.62 1617.95,4374.62 1656.96,4374.62 v1(1657.96,4375.62) ; v1(1614.96,4131.62) 1615.95,4132.62 1615.95,4184.62 1619.95,4180.62 1660.96,4180.62 v1(1661.96,4179.62) ; 1615.95,4269.62 1617.95,4267.62 1743.25,4267.62 1745.25,4265.62 ; 1615.95,4466.62 1615.95,4474.44 1625.64,4484.12 1633.45,4484.12 1647.95,4498.62 1739.25,4498.62 ; 1617.96,6530.62 1621.45,6534.12 1728.46,6534.12 1731.96,6537.62 ; 1619.96,6304.62 1621.45,6306.12 1734.46,6306.12 1735.96,6307.62 ; 1625.96,4837.62 1626.95,4838.62 1741.26,4838.62 1742.25,4839.62 ; 1627.96,6071.62 1629.46,6073.12 1734.46,6073.12 1735.96,6074.62 ; 1628.96,5063.62 1629.96,5064.62 1738.96,5064.62 1739.96,5065.62 ; 1628.96,5850.62 1630.46,5852.12 1738.46,5852.12 1739.96,5853.62 ; v1(1728.96,6478.62) 1728.96,6442.62 1731.96,6439.62 1733.96,6441.62 v1(1794.96,6441.62) ; 1729.96,3777.62 1729.96,4155.94 1743.64,4169.62 ; v1(1735.96,6165.62) 1735.96,6209.62 1736.96,6210.62 v1(1793.96,6210.62) ; v1(1738.96,5938.62) 1738.96,5973.62 1735.96,5976.62 v1(1793.96,5976.62) ; 1739.25,4398.62 1740.25,4397.62 1787.96,4397.62 ; v1(1739.96,5793.62) 1739.96,5755.62 1740.96,5756.62 v1(1795.96,5756.62) ; v1(1740.96,4698.62) 1740.96,4740.32 1742.25,4741.62 v1(1801.96,4741.62) ; v1(1740.96,4926.62) 1740.96,4927.62 1739.96,4928.62 1739.96,4967.62 v1(1799.96,4967.62) ; 1745.25,4165.62 1802.96,4165.62 1848.96,4211.62 1848.96,4336.62 1787.96,4397.62 ; v1(1842.96,5384.62) 1843.95,5385.61 1895.58,5385.61 1896.96,5386.99 1896.96,5435.62 1895.96,5436.62 v1(1895.96,5439.62) ; 2059.66,6437.62 2061.66,6439.62 2175.96,6439.62 2177.96,6441.62 2343.96,6441.62 2480.96,6304.62 2578.96,6304.62 ; 2063.66,5974.62 2068.16,5979.12 2169.46,5979.12 2173.96,5983.62 2290.95,5983.62 2411.96,6104.62 2578.96,6104.62 ; 2063.66,6207.62 2066.16,6210.12 2176.46,6210.12 2178.96,6212.62 2182.95,6208.62 2574.96,6208.62 2578.96,6204.62 ; 2066.96,4398.62 2068.96,4396.62 2178.95,4396.62 2180.95,4394.62 ; v1(2066.96,4540.62) 2066.96,4496.62 2122.96,4496.62 v1(2124.96,4498.62) ; 2067.66,4965.62 2069.16,4964.12 2179.45,4964.12 2180.96,4962.62 2548.96,4962.62 2575.96,4935.62 2575.96,4901.62 2578.96,4898.62 ; 2067.66,5753.62 2068.16,5753.12 2178.45,5753.12 2178.96,5752.62 2334.95,5752.62 2391.96,5809.62 2391.96,5929.62 2466.96,6004.62 2578.96,6004.62 ; 2069.96,4739.62 2070.45,4740.12 2183.46,4740.12 2183.96,4740.62 2425.95,4740.62 2478.96,4793.62 2478.96,4898.62 ; 2072.96,4165.62 2073.46,4165.12 2191.45,4165.12 2191.95,4164.62 ; v1(2073.96,4309.62) 2072.96,4308.62 2072.96,4263.62 v1(2135.96,4263.62) ; v1(2134.96,6529.62) 2135.95,6530.62 2176.96,6530.62 2177.96,6531.62 v1(2227.95,6531.62) ; v1(2173.96,6121.62) 2173.96,6073.62 2224.95,6073.62 v1(2225.96,6074.62) ; v1(2178.96,5886.62) 2178.96,5842.62 2231.95,5842.62 v1(2232.96,5843.62) ; v1(2178.96,6344.62) 2178.96,6302.62 2224.95,6302.62 v1(2225.96,6303.62) ; v1(2181.96,4866.62) 2181.96,4832.62 2183.96,4830.62 2184.96,4831.62 v1(2241.96,4831.62) ; v1(2181.96,5098.62) 2180.96,5097.62 2180.96,5052.62 2182.96,5054.62 v1(2227.96,5054.62) ; 2235.96,5594.62 2237.96,5592.62 2352.95,5592.62 2354.96,5590.62 ; 2242.96,5360.62 2245.45,5363.12 2355.46,5363.12 2357.96,5365.62 ; 2270.95,4394.62 2270.95,4342.62 2296.96,4316.62 2550.96,4316.62 2565.96,4331.62 2565.96,4419.62 2571.96,4425.62 ; 2281.95,4164.62 2281.95,4214.91 2293.67,4226.62 2547.96,4226.62 2564.96,4209.62 2564.96,4125.62 ; v1(2354.96,5526.62) 2354.96,5492.62 2414.96,5492.62 v1(2415.96,5493.62) ; v1(2357.96,5303.62) 2357.96,5267.62 v1(2410.96,5267.62) ; 2678.96,4898.62 2678.96,5258.92 2685.66,5265.62 2688.16,5263.12 2796.45,5263.12 2798.96,5260.62 ; 2682.66,5490.62 2687.16,5495.12 2792.46,5495.12 2796.96,5499.62 2802.11,5494.47 2841.42,5494.47 2865.96,5469.93 2865.96,5093.62 2778.96,5006.62 2778.96,4898.62 ; v1(2757.96,5353.62) 2795.95,5353.62 2798.96,5350.62 v1(2798.96,5391.62) ; v1(2794.96,5641.62) 2796.96,5639.62 2796.96,5589.62 2849.95,5589.62 v1(2852.96,5592.62)
  Top Layer w30: -1105.04,4300.62 -1205.04,4400.62 -1205.04,4583.62 -1151.04,4637.62 ; -1105.04,5599.62 -1168.04,5599.62 ; -1078.04,4637.62 -1151.04,4637.62 ; -1022.04,3690.62 -1028.62,3684.05 -1094.47,3684.05 -1170.04,3759.62 -1170.04,3943.62 -1107.04,4006.62 ; -1018.04,4301.62 -1104.04,4301.62 -1164.04,4241.62 -1164.04,4063.62 -1107.04,4006.62 ; -1017.04,4006.62 -1107.04,4006.62 ; -668.04,4418.62 -667.54,4419.12 -544.25,4419.12 -543.75,4419.62 ; -651.04,4616.62 -649.54,4618.12 -548.54,4618.12 -547.04,4619.62 -479.04,4619.62 -440.04,4658.62 -440.04,4813.62 -467.04,4840.62 ; -555.75,3708.62 -472.62,3708.62 -455.04,3726.2 -455.04,3889.62 -475.04,3909.62 -543.04,3909.62 ; -555.05,4519.62 -470.04,4519.62 -444.04,4493.62 -444.04,4356.62 -481.35,4319.32 -544.05,4319.32 ; -547.04,4840.62 -467.04,4840.62 ; -544.75,4016.62 -543.75,4015.62 -483.04,4015.62 -452.04,4046.62 -452.04,4182.62 -487.04,4217.62 -544.05,4217.62 ; -542.04,5061.62 -478.04,5061.62 ; -538.04,5284.62 -468.04,5284.62 ; -538.04,5500.62 -471.04,5500.62 ; -538.04,5715.62 -470.04,5715.62 ; -537.04,5936.62 -536.65,5937.02 -480.65,5937.02 ; -537.04,6165.62 -471.04,6165.62 ; -537.04,6392.62 -461.04,6392.62 ; 2007.27,4834.94 1978.96,4806.62 1978.96,4667.62 2026.96,4619.62 2614.96,4619.62 2671.96,4562.62 2671.96,4425.62 ; 2063.66,6074.62 1980.96,6074.62 ; 2063.66,6307.62 1988.96,6307.62 ; 2067.66,5065.62 2066.66,5066.62 2013.96,5066.62 1977.96,5030.62 1977.96,4874.62 2008.27,4844.31 2065.27,4844.31 2069.96,4839.62 ; 2067.66,5853.62 1980.96,5853.62 1948.96,5885.62 1948.96,6042.62 1980.96,6074.62 ; 2493.96,3792.62 2613.96,3792.62 2664.96,3843.62 2664.96,4125.62 2668.46,4129.12 2668.46,4422.12 2671.96,4425.62 ; 2685.66,5365.62 2606.53,5365.62 2588.96,5383.19 2588.96,5569.05 2606.53,5586.62 2678.66,5586.62 2682.66,5590.62 2682.66,5697.32 2715.96,5730.62 2847.96,5730.62 ; -1168.04,5599.62 -1206.04,5637.62 -1206.04,6269.62 -1147.04,6328.62 -1102.04,6328.62 -1094.78,6335.89 -956.04,6335.89 -909.04,6382.89 -909.04,6520.62 -834.04,6595.62 -567.04,6595.62 -566.04,6594.62 -488.04,6594.62 -422.04,6528.62 ; -1168.04,5599.62 -1205.04,5562.62 -1205.04,4691.62 -1151.04,4637.62 ; -480.65,5937.02 -427.04,5990.62 -427.04,6122.62 -470.04,6165.62 -471.04,6165.62 ; -480.65,5937.02 -430.04,5886.41 -430.04,5755.62 -470.04,5715.62 ; -478.04,5061.62 -427.04,5112.62 -427.04,5243.62 -468.04,5284.62 ; -478.04,5061.62 -431.04,5014.62 -431.04,4876.62 -467.04,4840.62 ; -471.04,5500.62 -426.04,5455.62 -426.04,5326.62 -468.04,5284.62 ; -471.04,5500.62 -427.04,5544.62 -427.04,5672.62 -470.04,5715.62 ; -471.04,6165.62 -420.04,6216.62 -420.04,6351.62 -461.04,6392.62 ; -461.04,6392.62 -422.04,6431.62 -422.04,6528.62 ; -422.04,6528.62 -355.05,6595.62 2063.96,6595.62 ; 1980.96,6074.62 1953.96,6101.62 1953.96,6272.62 1988.96,6307.62 ; 1988.96,6307.62 1956.96,6339.62 1956.96,6508.62 1985.96,6537.62 2059.66,6537.62 2063.96,6541.92 2063.96,6595.62 ; 2063.96,6595.62 2406.96,6595.62 2579.96,6422.62 2579.96,6403.62 2578.96,6402.62 2662.96,6402.62 2896.96,6168.62 2896.96,5779.62 2847.96,5730.62 ; 2671.96,4425.62 2794.96,4425.62 2878.96,4509.62 2878.96,4898.62 2878.96,5027.62 2905.96,5054.62 2905.96,5672.62 2847.96,5730.62
  Bottom Layer w20: -841.05,3726.25 -840.56,3726.73 -762.32,3726.73 v1(-761.83,3727.22) ; -832.05,4332.25 -759.46,4332.25 -755.09,4336.62 v1(-753.04,4336.62) ; -817.67,4636.61 -815.04,4639.24 -815.04,4716.43 v1(-813.64,4717.83) ; -812.05,4027.25 -809.12,4030.18 -741.49,4030.18 v1(-740.04,4031.62) ; 468.96,4989.62 680.96,4989.62 ; v1(1055.96,6195.62) 914.96,6195.62 744.96,6025.62 744.96,5325.62 880.96,5189.62 ; 1068.96,5189.62 880.96,5189.62 ; 1729.96,3777.62 1722.96,3784.62 1722.96,3839.62 1688.96,3873.62 1205.96,3873.62 1204.96,3872.62 900.96,3872.62 899.96,3871.62 899.96,4782.62 692.96,4989.62 680.96,4989.62 ; 680.96,4989.62 880.96,5189.62
  other v1: 1643.96,5388.62

## Polygon pours and split planes (outlines as drawn)
no net on Bottom Layer "NONET_L02_P000" (solid, remove dead copper, pour order 0): -390.04,6618.63 1869.96,6619.62 1870.96,6618.62 1870.96,5565.62 1872.96,5563.62 2469.96,5563.62 2471.96,5561.62 2471.96,5208.62 1889.96,5208.62 1884.96,5203.62 1884.96,3534.62 -390.04,3534.62
no net on Bottom Layer "NONET_L02_P003" (solid, remove dead copper, pour order 3): -1273.04,6621.62 2954.96,6621.62 2954.96,3339.62 -1272.04,3339.62
no net on Bottom Layer "NONET_L02_P002" (solid, pour order 2): -1273.04,6621.62
no net on Bottom Layer "NONET_L02_P001" (solid, pour order 1): -1273.04,6621.62

## Keep-outs
Keep-Out Layer:
  lines w39.37: 2987.96,3302.62 2987.96,3508.62 2987.96,6650.62 -1302.04,6650.62 -1302.04,3303.62 2987.96,3303.62

## Silkscreen, mask and mechanical layers (free items; w line width, h text height)
Top Overlay:
  text "Cau h1" at -945.04,6207.62 h30 r270
  text "Cau h3" at 2719.09,6200.76 h30 r270
  text "Cau H2" at -960.91,5436.76 h30 r270
  text "Cau H4" at 2562.82,5039.76 h30
  text "BOM" at -1262.04,4801.62 h30 r270
  text "SW2" at 2833.96,4391.62 h30 r90
  text "COI" at -1188.04,4385.62 h30 r270
  text "LED2" at -1189.04,4109.62 h30 r270
  text "SW1" at 2821.96,4104.62 h30 r90
  text "Sensor1" at 159.96,3918.62 h30
  text "Sensor2" at 433.82,3910.76 h30
  text "LED1" at -1189.04,3791.62 h30 r270
  text "P-GND" at 1380.96,3757.62 h30
  text "GND" at 2196.96,3756.62 h30
  text "5V-MCU" at 1823.82,3751.76 h30
  text "5V" at 2605.96,3719.62 h30
  text "Sensor3" at 788.96,3413.62 h30
  text "Sensor4" at 1086.96,3411.62 h30